# Altium PCB AT90PWM_PCB_Diff_v2.PcbDoc
Units mm, origin at the board's own origin, x right, y up, seen from the top; angles counter-clockwise.
Board outline 55 x 40 mm, 4 copper layers (Top Layer, Internal Plane 1, Internal Plane 2, Bottom Layer); 11 components, 21 nets, 66 pads, 4 vias.
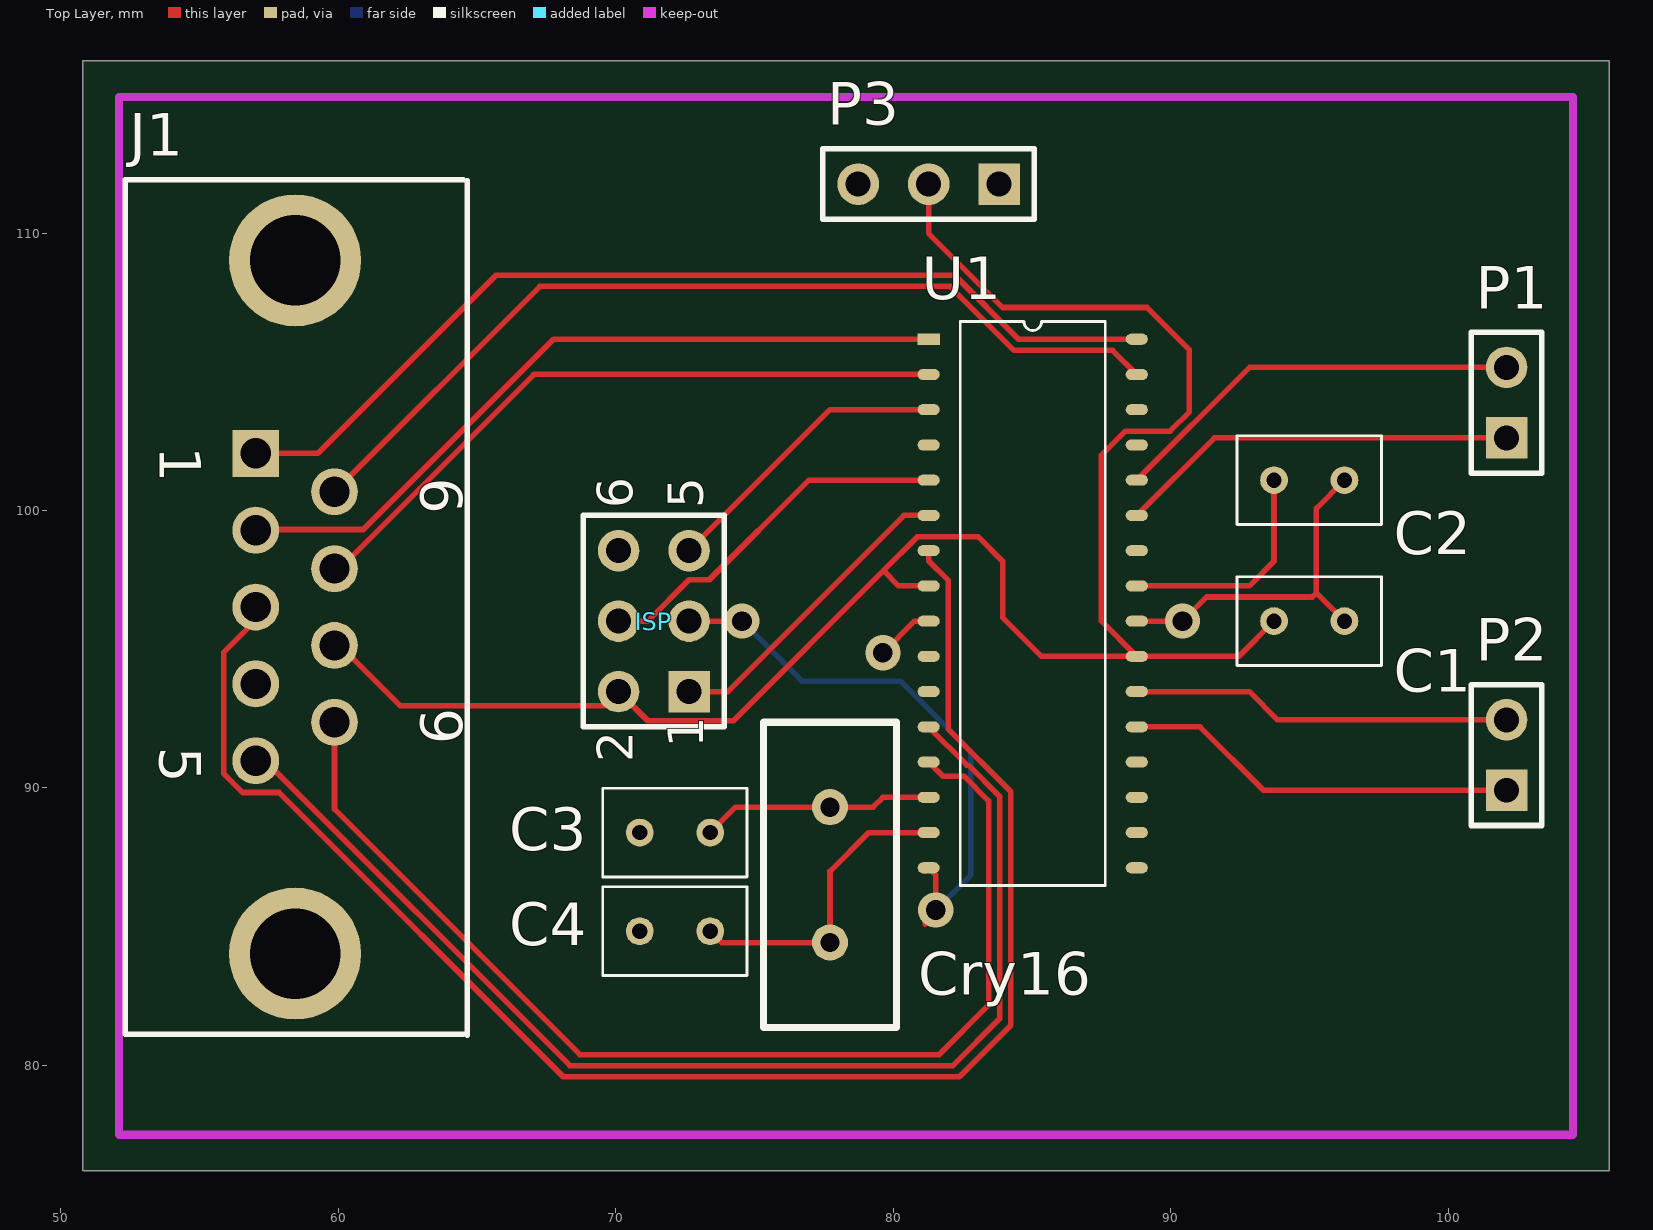
[diagram p0: Top Layer view]
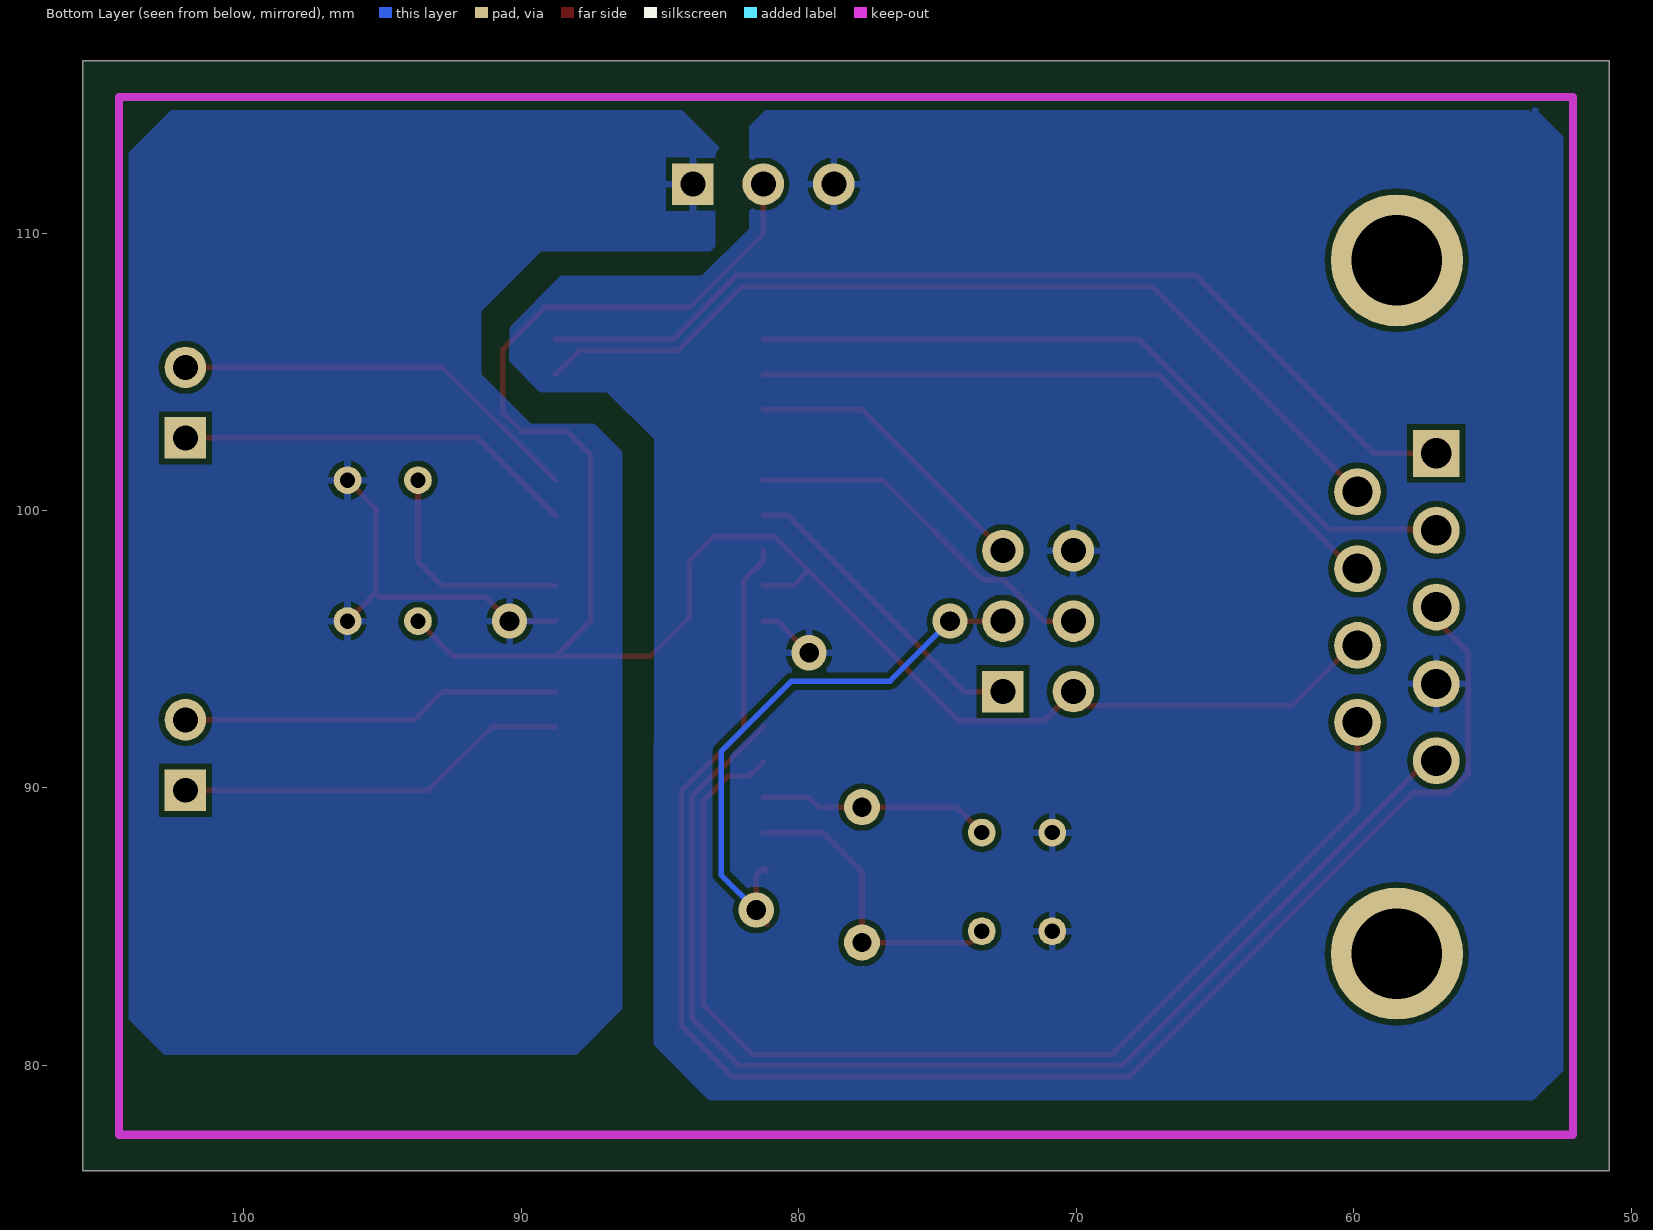
[diagram p1: Bottom Layer view, seen from below]
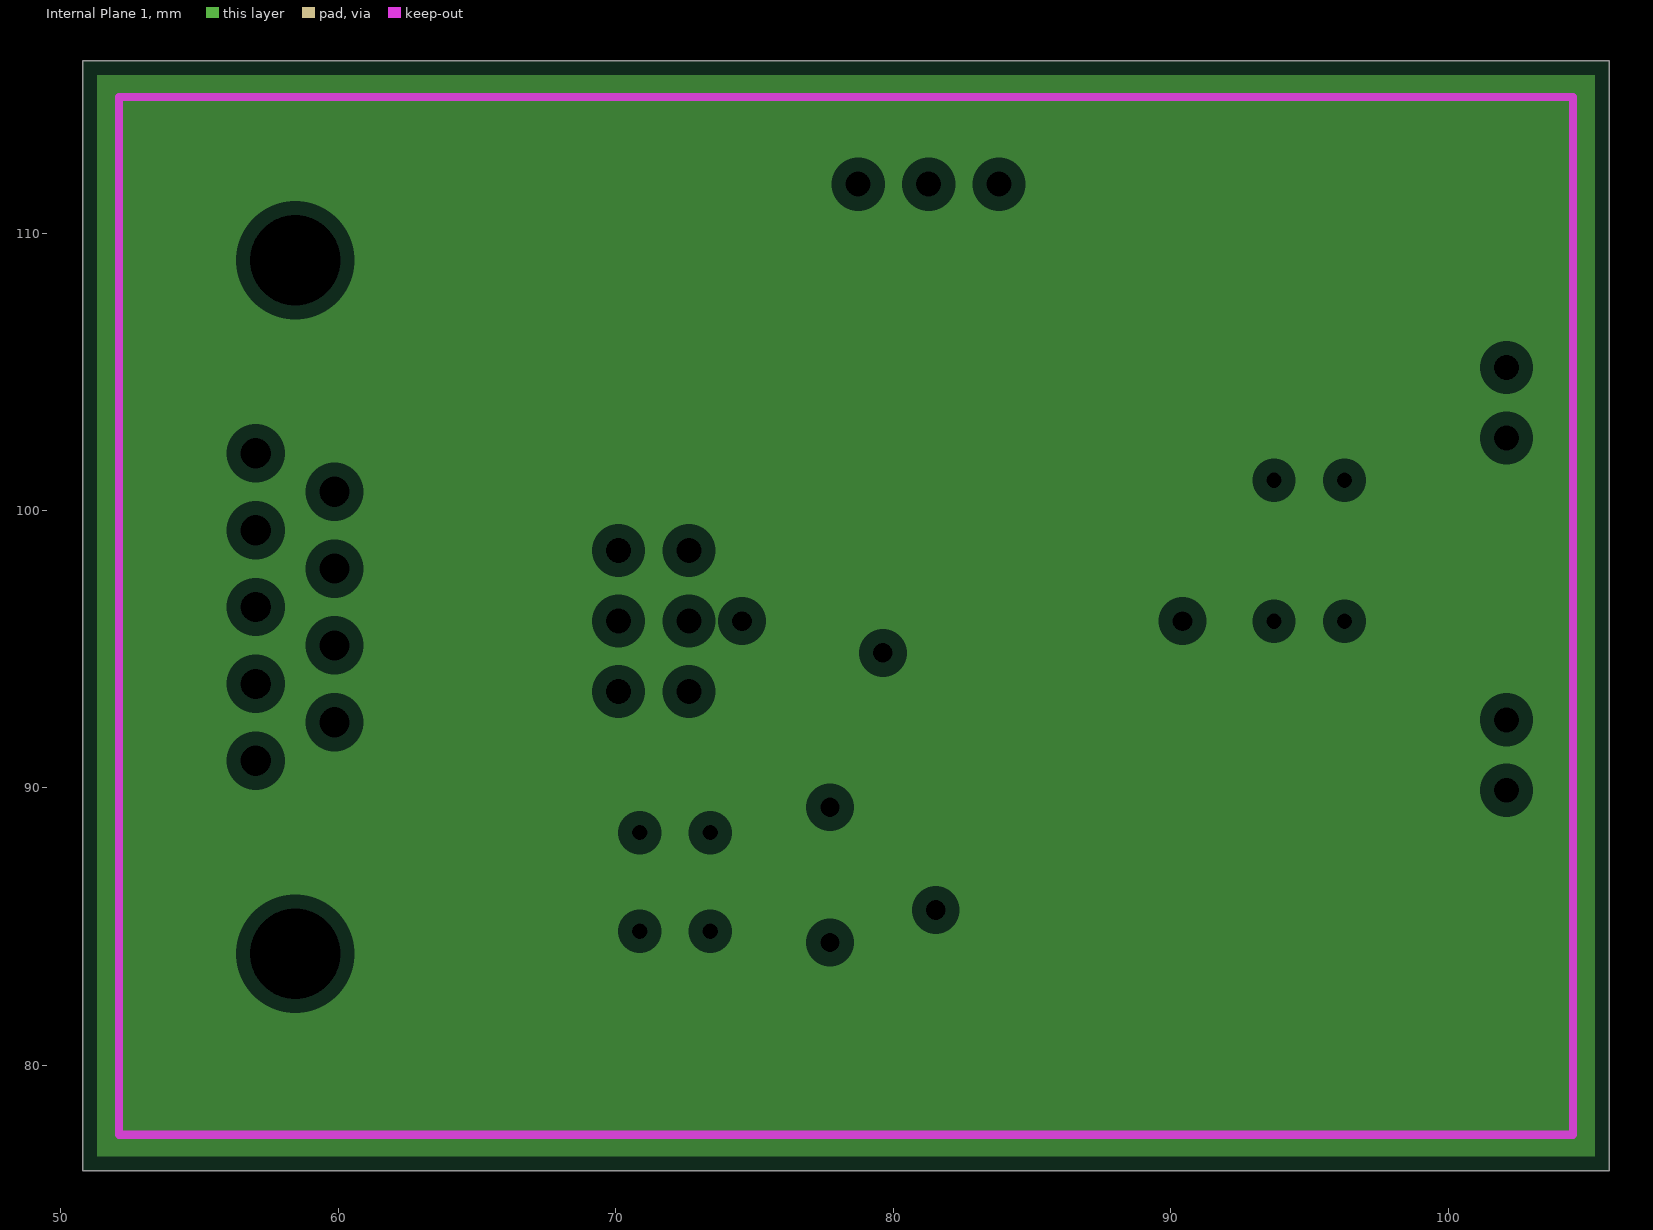
[diagram p2: Internal Plane 1, clearances drawn from the general rule]
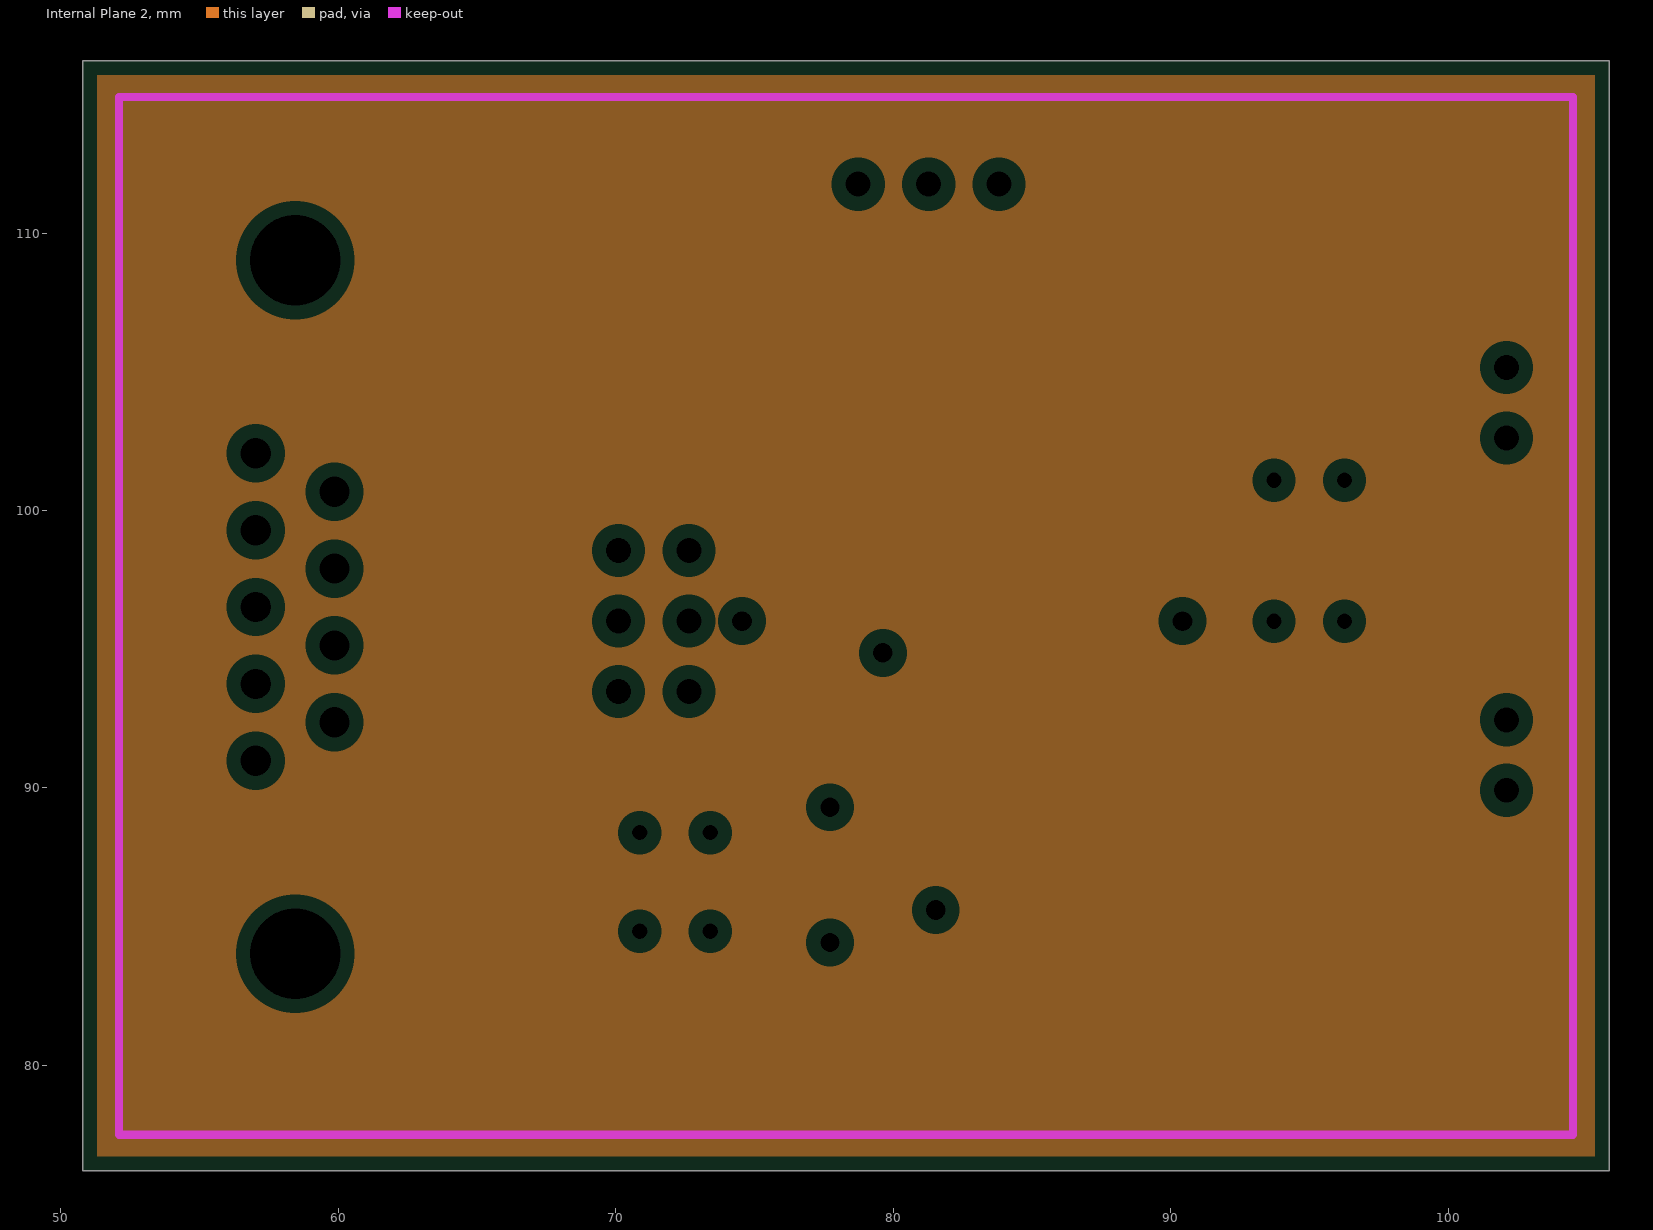
[diagram p3: Internal Plane 2, clearances drawn from the general rule]

## Layer stack, top to bottom
Top Layer: signal copper 0.0356
Dielectric: dielectric 0.32, FR-4, Dk 4.8
Internal Plane 1: plane copper 0.0356
Dielectric: dielectric 0.32, FR-4, Dk 4.8
Internal Plane 2: plane copper 0.0356
Dielectric: dielectric 0.32, FR-4, Dk 4.8
Bottom Layer: signal copper 0.0356

## Board outline
50.8,76.2 105.8,76.2 105.8,116.2 50.8,116.2

## Design rules (kind name [scope] priority, off if disabled: settings)
Clearance [All] p1: gap=0.2
PlaneClearance [All] p1: clearance=0.508
PlaneConnect [All] p1: planeconnectstyle=Relief reliefexpansion=0.508 reliefentries=4 reliefconductorwidth=0.254 reliefairgap=0.254
PolygonConnect [All] p1: connectstyle=Relief reliefconductorwidth=0.254 reliefentries=4 polygonreliefangle="90 Angle"
RoutingVias [All] p1: holewidth=0.6 width=1 viastyle="Through Hole" minholewidth=0.711 minwidth=1.27 maxholewidth=0.711 maxwidth=1.27
SilkscreenOverComponentPads [All] p1: minsilkscreentomaskgap=0.254
SolderMaskExpansion [All] p1: expansion=0.102
Width [All] p1: maxlimit=0.2 minlimit=0.2 preferedwidth=0.2
25 further rules are at their usual default settings.

## Components (designator, comment, footprint, x,y, rotation, side; value= is the part's Value field where it differs from the comment)
C1 "Cap" NPolar_Cap 94.996,96.012 r180 top
C2 "Cap" NPolar_Cap 94.996,101.092 r180 top
C3 "Cap" NPolar_Cap 72.136,88.392 r0 top
C4 "Cap" NPolar_Cap 72.136,84.836 r0 top
Cry16 "XTAL" "16MHz Crystal" 77.724,86.868 r0 top
ISP "Header 3X2" HDR2X3 72.644,93.472 r90 top
J1 "D Connector 9" DSUB1.385-2H9 58.42,96.52 r270 top
P1 "Header 1" HDR1X2 102.108,102.616 r90 top
P2 "Header 2" HDR1X2 102.108,89.916 r90 top
P3 "Header 3" HDR1X3 83.82,111.76 r180 top
U1 "AT90PWM3" AT90PWM3B 81.28,106.172 r0 top

## Footprints (in the part's own frame and the unit in brackets; to place one, negate y for a bottom-side part, rotate by r counter-clockwise, add the part's x,y. Pads: shape width x height; smd on the part's side, far side on the other; paste and mask are expansions set on the pad)
"16MHz Crystal" [mm] "Crystal, Thru-Hole; 2 Leads; Body 3.1 x 8.2 mm (Dia.xH)"
  round 1.3 hole 0.7: 1(0,2.44) 2(0,-2.44)
  silkscreen extent -2.4,-5.5 2.4,5.5
AT90PWM3B [mm]
  rect 0.8x0.4 smd: 1(0,0)
  oval 0.8x0.4 smd: 2(0,-1.27) 3(0,-2.54) 4(0,-3.81) 5(0,-5.08) 6(0,-6.35) 7(0,-7.62) 8(0,-8.89) 9(0,-10.16) 10(0,-11.43) 11(0,-12.7) 12(0,-13.97) 13(0,-15.24) 14(0,-16.51) 15(0,-17.78) 16(0,-19.05) 17(7.5,-19.05) 18(7.5,-17.78) 19(7.5,-16.51) 20(7.5,-15.24) 21(7.5,-13.97) 22(7.5,-12.7) 23(7.5,-11.43) 24(7.5,-10.16) 25(7.5,-8.89) 26(7.5,-7.62) 27(7.5,-6.35) 28(7.5,-5.08) 29(7.5,-3.81) 30(7.5,-2.54) 31(7.5,-1.27) 32(7.5,0)
  silkscreen extent 1.13,-19.68 6.37,0.64
DSUB1.385-2H9 [mm] "Connector; D Subminiature; 9 Position; Right Angle; Pitch 1.385 mm"
  rect 1.69x1.69 hole 1.09: 1(-5.54,-1.395)
  round 1.69 hole 1.09: 2(-2.77,-1.395) 3(0,-1.395) 4(2.77,-1.395) 5(5.54,-1.395) 6(-4.155,1.445) 7(-1.385,1.445) 8(1.385,1.445) 9(4.155,1.445)
  round 4.76 hole 3.26: 10(-12.495,0.025) 11(12.495,0.025)
  silkscreen extent -15.4,-6.09 15.43,6.22
HDR1X2 [mm] "Connector; Header; 2 Position"
  rect 1.5x1.5 hole 0.9: 1(0,0)
  round 1.5 hole 0.9: 2(2.54,0)
  silkscreen extent -1.27,-1.27 3.81,1.27
HDR1X3 [mm] "Connector; Header; 3 Position"
  rect 1.5x1.5 hole 0.9: 1(0,0)
  round 1.5 hole 0.9: 2(2.54,0) 3(5.08,0)
  silkscreen extent -1.27,-1.27 6.35,1.27
HDR2X3 [mm] "Connector; Header; 3x2 Position"
  rect 1.5x1.5 hole 0.9: 1(0,0)
  round 1.5 hole 0.9: 2(0,2.54) 3(2.54,0) 4(2.54,2.54) 5(5.08,0) 6(5.08,2.54)
  silkscreen extent -1.27,-1.27 6.35,3.81
NPolar_Cap [mm]
  round 1 hole 0.55: 1(-1.27,0) 2(1.27,0)
  silkscreen extent -2.6,-1.6 2.6,1.6

## Part data
C1 C2 C3 C4: "Capacitor"
Cry16: "Crystal Oscillator"
ISP: "Header, 3-Pin, Dual row"
J1: "Receptacle Assembly, 9 Position, Right Angle"
P1: library part "Header 2", "Header, 2-Pin"
P2: "Header, 2-Pin"
P3: "Header, 3-Pin"

## Via types
v1: diameter 1.27, hole 0.711, Top Layer to Bottom Layer, 4 vias

## Nets (pads, with @x,y where several pads share a name; then routed paths per layer and width w, separated by ;. In a path a pad name is that pad's centre, name@x,y a point inside that pad or via, vN(x,y) a via of type N, cw(c..) or ccw(c..) an arc to the next point about the centre after c; other vN are vias at no path point)
5V: C1.2 ISP.2 J1.8 P3.2 U1.8 U1.23 | length 70.3
  Top Layer w0.2: J1.8 60.059,95.135 62.23,92.964 69.596,92.964 ISP.2 71.154,92.422 74.243,92.422 79.65,97.83 ; U1.8 80.198,97.282 79.65,97.83 ; P3.2 81.28,109.982 83.947,107.315 89.154,107.315 90.678,105.791 90.678,103.556 89.984,102.862 88.373,102.862 87.503,101.992 87.503,96.019 U1.23 ; C1.2 92.456,94.742 U1.23 ; 79.65,97.83 80.873,99.052 80.891,99.052 80.899,99.06 83.058,99.06 83.947,98.171 83.947,96.139 85.344,94.742 U1.23
\R\E\S\E\T\: ISP.5 U1.3 | length 10.7
  Top Layer w0.2: ISP.5 77.724,103.632 U1.3
AGND: C1.1 C2.1 P3.1 U1.24 | length 12.8
  Top Layer w0.2: U1.24 v1(90.424,96.012) 91.294,96.882 95.104,96.882 95.25,97.028 ; C1.1 95.25,97.028 ; C2.1 95.25,100.076 95.25,97.028
DGND: C3.1 C4.1 ISP.6 J1.4 P3.3 U1.9 | length 2.1
  Top Layer w0.2: v1(79.629,94.869) 80.772,96.012 U1.9
ISEN_1: P1.2 U1.28 | length 15
  Top Layer w0.2: U1.28 92.844,105.156 P1.2
ISEN_2: P2.2 U1.22 | length 13.7
  Top Layer w0.2: U1.22 92.837,93.472 93.853,92.456 P2.2
MISO_A: ISP.4 U1.5 | length 13.3
  Top Layer w0.2: ISP.4 71.159,96.012 72.649,97.502 73.372,97.502 76.962,101.092 U1.5
MOSI_A: ISP.1 U1.6 | length 11.3
  Top Layer w0.2: ISP.1 74.041,93.472 80.391,99.822 U1.6
NetC2_2: C2.2 U1.25 | length 8.2
  Top Layer w0.2: U1.25 92.837,97.282 93.726,98.171 C2.2
SCK_A: ISP.3 U1.16 | length 20.7
  Top Layer w0.2: ISP.3 v1(74.549,96.012) ; 81.153,85.09 v1@81.153,85.598 ; U1.16@81.153,86.995 U1.16 81.534,86.868 v1(81.534,85.598)
  Bottom Layer w0.2: v1(74.549,96.012) 76.708,93.853 80.264,93.853 82.804,91.313 82.804,86.868 v1(81.534,85.598)
SEN_GND1: P1.1 U1.27 | length 14.5
  Top Layer w0.2: U1.27 91.574,102.616 P1.1
SEN_GND2: P2.1 U1.21 | length 14.3
  Top Layer w0.2: U1.21 91.059,92.202 93.345,89.916 P2.1
UH: J1.2 U1.1 | length 27.1
  Top Layer w0.2: J1.2 57.049,99.314 60.902,99.314 67.76,106.172 U1.1
UL: J1.1 U1.32 | length 35.4
  Top Layer w0.2: J1.1 59.261,102.06 65.678,108.477 82.219,108.477 84.524,106.172 U1.32
VFO: J1.3 U1.7 | length 58.5
  Top Layer w0.2: J1.3 57.025,96.04 55.88,94.895 55.88,90.506 56.551,89.835 57.866,89.835 68.11,79.591 82.385,79.591 84.239,81.445 84.239,89.866 81.98,92.125 81.98,97.489 81.28,98.189 U1.7
VH: J1.7 U1.2 | length 24.3
  Top Layer w0.2: J1.7 60.059,97.905 67.056,104.902 U1.2
VL: J1.6 U1.31 | length 33.3
  Top Layer w0.2: J1.6 67.267,108.077 82.054,108.077 84.359,105.772 87.91,105.772 U1.31
WH: J1.5 U1.12 | length 43.7
  Top Layer w0.2: J1.5 57.356,90.98 68.345,79.991 82.15,79.991 83.839,81.68 83.839,89.701 82.716,90.824 82.658,90.824 U1.12
WL: J1.9 U1.13 | length 41.2
  Top Layer w0.2: J1.9 59.865,89.233 68.707,80.391 81.661,80.391 83.439,82.169 83.439,89.535 82.55,90.424 81.788,90.424 U1.13
XTAL1: C3.2 Cry16.1 U1.14 | length 8.4
  Top Layer w0.2: C3.2 74.322,89.308 Cry16.1 79.275,89.308 79.629,89.662 U1.14
XTAL2: C4.2 Cry16.2 U1.15 | length 11.2
  Top Layer w0.2: C4.2 73.814,84.428 Cry16.2 77.724,86.995 79.121,88.392 U1.15
pads on no net: J1.10 J1.11 U1.4 U1.10 U1.11 U1.17 U1.18 U1.19 U1.20 U1.26 U1.29 U1.30

## Polygon pours and split planes (outlines as drawn)
AGND on Bottom Layer "Botom_AGND" (solid, pour order 1000): 86.36,82.042 86.36,102.108 87.376,103.124 89.662,103.124 91.44,104.902 91.44,107.188 89.281,109.347 83.185,109.347 82.423,110.109 82.423,112.649 84.201,114.427 102.616,114.427 104.5,112.543 104.5,82.021 102.87,80.391 88.011,80.391
DGND on Bottom Layer "Bottom_DGND" (solid, pour order 1000): 52.234,80.046 cw(c52.324,80.137) 52.197,80.137 52.197,113.157 cw(c52.324,113.157) 52.234,113.248 52.234,113.247 53.34,114.353 53.34,114.554 cw(c53.467,114.554) 53.594,114.554 53.594,114.314 cw(c53.721,114.3) 53.721,114.427 81.153,114.427 cw(c81.153,114.3) 81.244,114.39 81.243,114.39 81.751,113.882 81.751,113.883 cw(c81.661,113.792) 81.788,113.792 81.788,110.162 83.492,108.458 88.519,108.458 cw(c88.519,108.331) 88.61,108.421 88.609,108.421 90.387,106.643 90.387,106.644 cw(c90.297,106.553) 90.424,106.553 90.424,105.41 cw(c90.297,105.41) 90.387,105.319 90.387,105.32 89.371,104.304 89.372,104.304 cw(c89.281,104.394) 89.281,104.267 86.921,104.267 85.217,102.563 85.217,80.772 cw(c85.09,80.772) 85.18,80.681 85.18,80.682 83.275,78.777 83.276,78.777 cw(c83.185,78.867) 83.185,78.74 53.594,78.74 cw(c53.594,78.867) 53.503,78.777 53.504,78.777
no net on Internal Plane 1 (split plane): 105.29,76.71 51.31,76.71 51.31,115.69 105.29,115.69
no net on Internal Plane 2 (split plane): 105.29,76.71 51.31,76.71 51.31,115.69 105.29,115.69

## Keep-outs
Keep-Out Layer:
  lines w0.3: 52.1,77.5 52.1,114.9 104.5,114.9 104.5,77.5 52.1,77.5

## Silkscreen, mask and mechanical layers (free items; w line width, h text height)
Mechanical 2:
  lines w0.254: 53.467,114.554 53.467,114.3 52.324,113.157 52.324,80.137 53.594,78.867 83.185,78.867 85.09,80.772 85.09,102.616 86.868,104.394 89.281,104.394 90.297,105.41 90.297,106.553 88.519,108.331 83.439,108.331 81.661,110.109 81.661,113.792 81.153,114.3 53.721,114.3
Mechanical 3:
  lines w0.254: 82.423,110.109 83.185,109.347 89.281,109.347 91.44,107.188 91.44,104.902 89.662,103.124 87.376,103.124 86.36,102.108 86.36,82.042 88.011,80.391 102.87,80.391 104.5,82.021 104.5,112.543 102.616,114.427 84.201,114.427 82.423,112.649 82.423,110.109
Drill Drawing:
  text ".LEGEND" at 110.88,81.28 h1.52
  text "Drill Drawing." at 110.88,78.74 h1.52

## Dimensions
52.1,77.5 to 52.1,114.9 on Mechanical 1
52.1,77.5 to 104.5,77.5 on Mechanical 1

## Text inside footprints (layer, text, board x,y; h text height)
ISP: Top Overlay "6" at 70.612,100.076 h1.27 r90; Top Overlay "5" at 73.152,100.076 h1.27 r90; Top Overlay "2" at 70.612,90.932 h1.27 r90; Top Overlay "1" at 73.152,91.44 h1.27 r90
J1: Top Overlay "1" at 53.57,102.31 h1.5 r270; Top Overlay "5" at 53.57,91.48 h1.5 r270; Top Overlay "9" at 62.97,92.865 h1.5 r270; Top Overlay "6" at 62.97,101.175 h1.5 r270